# EAGLE board 2. prototipus - THT - Egyoldalas (EAGLE 7.2.0)
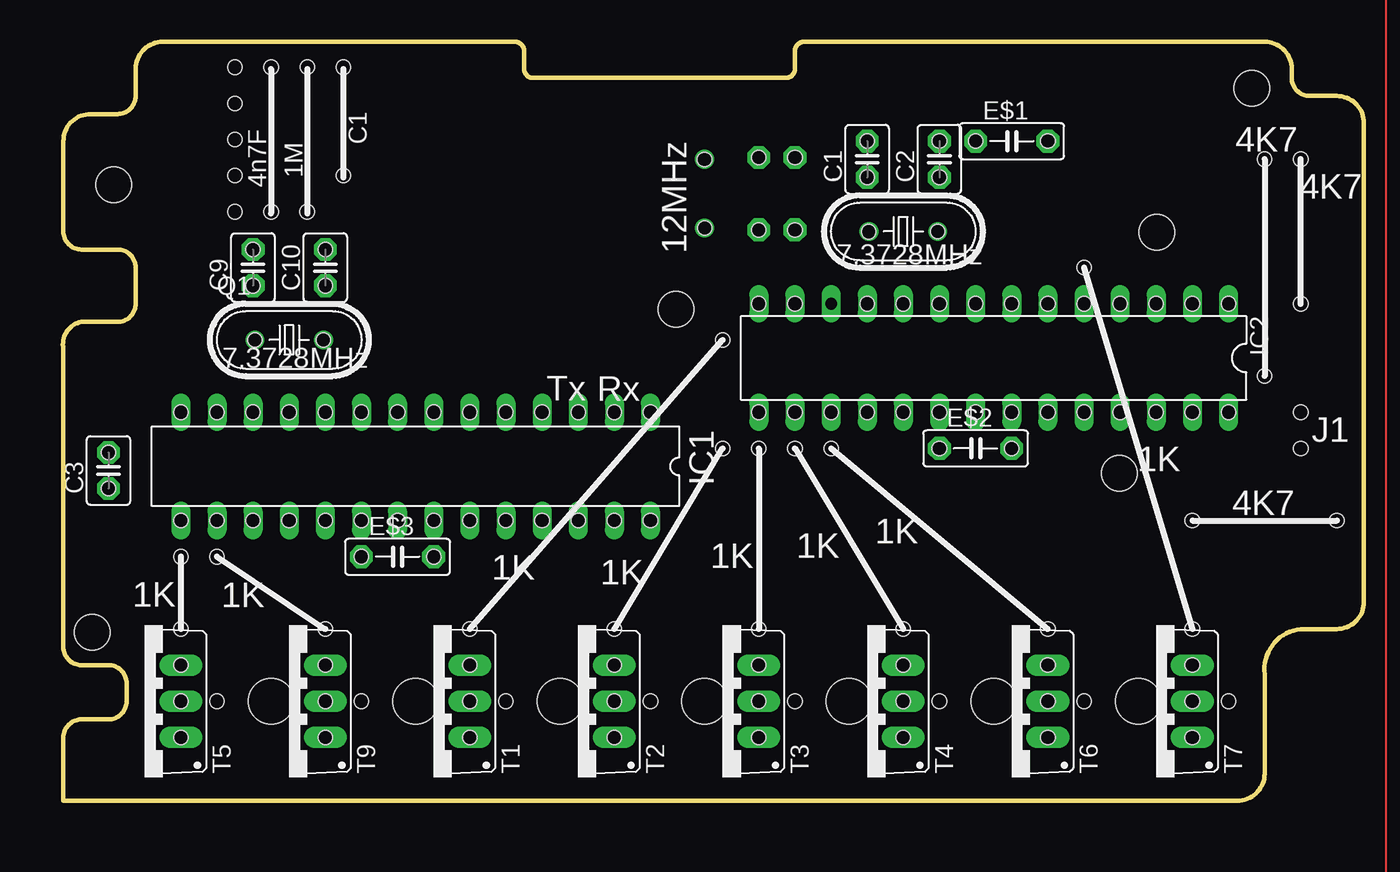
[diagram p0: board, top side]
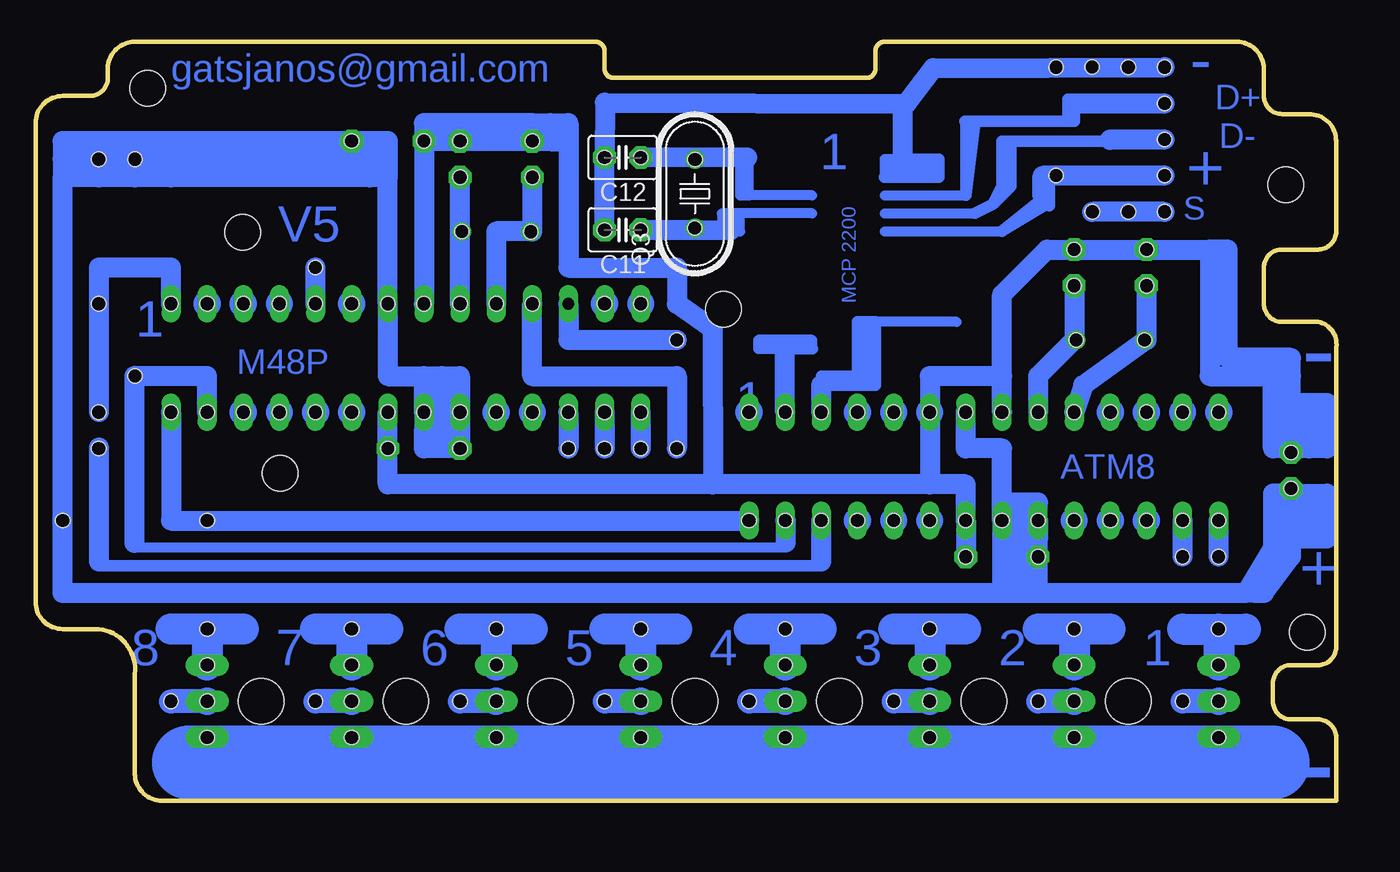
[diagram p1: board, bottom side, seen from below]

Size 91.47 x 53.34 mm. Coordinates in mm from the lower left corner, seen from the top.
Outline: 0.03,0 0.03,4.45 arc-90 1.3,5.71 3.21,5.71 arc90 4.48,6.98 4.48,8.25 arc90 3.21,9.53 1.3,9.53 arc-90 0.03,10.79 0.03,31.75 arc-90 1.3,33.66 3.84,33.66 arc90 5.11,34.92 5.11,37.46 arc90 3.84,38.73 1.3,38.73 arc-90 0.03,40.01 0.03,46.35 arc-90 1.94,48.26 3.84,48.26 arc90 5.11,49.53 5.11,51.44 arc-90 7.02,53.34 31.78,53.34 arc-90 32.42,52.7 32.42,51.44 arc90 33.05,50.8 50.83,50.8 arc90 51.47,51.44 51.47,52.7 arc-90 52.1,53.34 84.49,53.34 arc-90 86.39,51.44 86.39,50.8 arc90 87.66,49.53 89.57,49.53 arc-90 91.47,47.62 91.47,13.97 arc-90 89.57,12.07 87.03,12.07 arc90 84.49,8.89 84.49,1.9 arc-90 82.58,0 0.03,0
Copper layers (1*16): Top 0.035mm / dielectric 1.5mm / Bottom 0.035mm
Design rules "default": minimum track width 10mil, minimum drill 24mil, track to track 8mil, track to pad 8mil, pad to pad 8mil, via to via 8mil, smd to smd 8mil, copper to edge 40mil, drill to drill 8mil, minimum pad ring 10mil, minimum via ring 8mil, stop-mask expansion 4mil, vias tented up to drill 0mil, thermal gap 10mil
Holes 1 mm at 79.41,19.68 84.49,29.84 71.79,37.46 79.41,12.07 69.25,12.07 59.09,12.07 48.93,12.07 38.77,12.07 28.61,12.07 18.45,12.07 8.29,12.07 10.83,17.14 8.29,17.14 48.93,24.77 51.47,24.77 54.01,24.77 46.39,32.38 46.39,24.77 89.57,19.68 19.71,51.55 19.71,43.93 12.09,51.55 12.09,49.01 12.09,46.47 12.09,43.93 12.09,41.39 14.63,41.39 17.17,41.39 14.63,51.55 17.19,51.58 51.46,45.2 51.46,40.12 48.92,40.12 48.92,45.2 45.11,45.07 45.11,40.24 13.37,38.73 13.37,36.2 18.45,36.2 18.45,38.73 18.32,32.38 13.49,32.38 18.45,27.3 20.99,27.3 56.55,43.81 56.55,46.35 61.63,46.35 61.63,43.81 61.5,40.01 56.66,39.99 59.09,34.92 61.63,34.92 64.17,34.92 23.53,27.3 26.07,27.3 33.69,27.3 8.29,27.3 10.83,27.3 13.37,27.3 15.91,27.3 28.61,27.3 31.15,27.3 36.23,27.3 38.77,27.3 41.31,27.3 41.31,19.68 38.77,19.68 36.23,19.68 33.69,19.68 31.15,19.68 28.61,19.68 26.07,19.68 23.53,19.68 20.99,19.68 18.45,19.68 15.91,19.68 13.37,19.68 10.83,19.68 8.29,19.68 48.93,27.3 51.47,27.3 54.01,27.3 56.55,27.3 59.09,27.3 61.63,27.3 64.17,27.3 66.71,27.3 69.25,27.3 71.79,27.3 74.33,27.3 76.87,27.3 79.41,27.3 81.95,27.3 81.95,34.92 79.41,34.92 76.87,34.92 74.33,34.92 71.79,34.92 69.25,34.92 66.71,34.92 56.55,34.92 51.47,34.92 48.93,34.92 8.29,9.53 8.29,6.98 8.29,4.45 18.45,4.45 18.45,6.98 18.45,9.53 28.61,9.53 28.61,6.98 28.61,4.45 38.77,4.45 38.77,6.98 38.77,9.53 48.93,9.53 48.93,6.98 48.93,4.45 59.09,4.45 59.09,6.98 59.09,9.53 69.25,9.53 69.25,6.98 69.25,4.45 79.41,4.45 79.41,6.98 79.41,9.53 64.17,46.35 69.25,46.35 20.99,17.14 26.07,17.14 87.03,34.92 87.03,45.09 84.49,45.09 61.63,24.77 66.71,24.77 3.21,24.48 3.21,21.94 87.03,27.3 87.03,24.77 10.83,6.98 20.99,6.98 31.15,6.98 41.31,6.98 51.47,6.98 61.63,6.98 71.79,6.98 81.95,6.98
Holes 3.2 mm at 14.64,6.98 24.8,6.98 34.96,6.98 45.12,6.98 55.28,6.98 65.44,6.98 75.6,6.98
Holes 2.5 mm at 83.58,50.06 76.91,39.96 74.27,23.01 2.06,11.84 3.57,43.29 43.11,34.55
vRestrict: area 29.2,31.7 to 40,45.1

## Footprints (pad centres in the part's own frame; a part is rotated, then mirrored left to right if it is on the bottom)
HC49U70 = drill 0.813: 1 -2.413,0; 2 2.413,0
C2.5-3 = drill 0.813 pad 1.6 octagon: 1 -1.27,0; 2 1.27,0
C5B2.5 = drill 0.813 pad 1.6 octagon: 1 -2.54,0; 2 2.54,0
DIL28-3 = drill 0.813 long: 1 -16.51,-3.81; 2 -13.97,-3.81; 3 -11.43,-3.81; 4 -8.89,-3.81; 5 -6.35,-3.81; 6 -3.81,-3.81; 7 -1.27,-3.81; 8 1.27,-3.81; 9 3.81,-3.81; 10 6.35,-3.81; 11 8.89,-3.81; 12 11.43,-3.81; 13 13.97,-3.81; 14 16.51,-3.81; 15 16.51,3.81; 16 13.97,3.81; 17 11.43,3.81; 18 8.89,3.81; 19 6.35,3.81; 20 3.81,3.81; 21 1.27,3.81; 22 -1.27,3.81; 23 -3.81,3.81; 24 -6.35,3.81; 25 -8.89,3.81; 26 -11.43,3.81; 27 -13.97,3.81; 28 -16.51,3.81
TO220BV = drill 1.016 long: 1 -2.54,-2.54; 2 0,-2.54; 3 2.54,-2.54

## Placement (x,y rotation side)
-  [HC49U70]  59.09,40.01 0 top
C1  [C2.5-3]  56.55,45.09 90 top
C2  [C2.5-3]  61.63,45.09 90 top
C3  [C2.5-3]  3.21,23.21 90 top
C9  [C2.5-3]  13.37,37.46 90 top
C10  [C2.5-3]  18.45,37.46 90 top
C11  [C2.5-3]  50.19,40.12 180 bottom
C12  [C2.5-3]  50.19,45.2 180 bottom
E$1  [C5B2.5]  66.71,46.35 0 top
E$2  [C5B2.5]  64.17,24.77 0 top
E$3  [C5B2.5]  23.53,17.14 0 top
IC1  MEGA8-P  [DIL28-3]  24.8,23.5 180 top
IC2  [DIL28-3]  65.44,31.12 180 top
Q1  [HC49U70]  15.91,32.38 0 top
Q3  [HC49U70]  45.11,42.66 90 bottom
T1  2SC1306  [TO220BV]  26.07,6.98 90 top
T2  2SC1306  [TO220BV]  36.23,6.98 90 top
T3  2SC1306  [TO220BV]  46.39,6.98 90 top
T4  2SC1306  [TO220BV]  56.55,6.98 90 top
T5  2SC1306  [TO220BV]  5.75,6.98 90 top
T6  2SC1306  [TO220BV]  66.71,6.98 90 top
T7  2SC1306  [TO220BV]  76.87,6.98 90 top
T9  2SC1306  [TO220BV]  15.91,6.98 90 top

## Library data of the parts
- Q1 Q3 = crystal; OC_FARNELL: unknown; OC_NEWARK: unknown
C1-C3 C9-C12 E$1-E$3 = capacitor-wima
IC1 = atmel; OC_FARNELL: unknown; OC_NEWARK: unknown
IC2 = ic-package
T1-T7 T9 = transistor-neu-to92

## Nets
GND: C1.2 C2.2 C9.2 C10.2 IC1.8 IC1.22 IC2.8 IC2.22
N$1: IC1.7 IC1.20 IC1.21 IC2.7 IC2.20 IC2.21
S$2: C2.1 IC2.9
S$3: C1.1 IC2.10
S$5: C10.1 IC1.9
S$6: C9.1
S$8: IC1.15
S$9: IC1.16
S$10: T5.3
S$11: T9.3
S$12: T1.3
S$13: T2.3
S$14: T3.3
S$15: T4.3
S$16: T6.3
S$17: T7.3
S$19: IC2.11
S$20: IC2.12
S$21: IC2.15
S$22: IC2.16
S$23: IC2.17
S$24: IC2.5
S$28: IC1.28 IC2.28
S$29: C11.2 C12.2
S$30: C11.1
S$33: T3.2
S$38: IC1.2
S$42: IC1.3
S$46: IC1.14
S$58: IC2.27
S$60: IC2.1
S$68: C12.1

## Tracks (layer width: path | path; a pad name or v marks a point on that pad's centre or on a via)
GND
  Bottom 1.016: 57.82,46.35 C2.2 64.17,46.35 | 20.35,38.73 C10.2 C9.2
  Bottom 1.422: C1.2 57.82,46.35 | 57.82,46.35 64.17,46.35 | 64.17,46.35 IC2.8 | C1.2 56.55,47.62 | 56.55,47.62 57.82,47.62 | 57.82,47.62 57.82,46.35 | 57.82,47.62 64.17,47.62 64.17,46.35 | 55.28,46.35 C1.2 | 56.55,47.62 55.28,47.62 | 55.28,47.62 55.28,46.35 | IC2.22 66.71,22.23 43.85,22.23 | 28.61,22.23 26.07,22.23 IC1.22 26.07,17.14 | 28.61,22.23 43.85,22.23 | IC1.8 23.53,29.84 | 23.53,29.84 23.53,35.56 20.35,38.73 C9.2 8.92,38.73 | 8.92,38.73 8.92,29.84 4.48,29.84 | 4.48,24.77 4.48,29.84 | 3.21,29.84 4.48,29.84 | 23.53,29.84 28.61,29.84 28.61,22.23 | 3.21,29.84 3.21,31.12 7.65,31.12 7.65,38.73 8.92,38.73 | 3.21,25.4 3.21,29.84 | 55.28,47.62 54.01,47.62 54.01,46.35 | 55.28,46.35 54.01,46.35 | 54.01,46.35 54.01,37.46 46.39,37.46 46.39,34.92 43.86,33.17 43.85,22.23
N$1
  Bottom 1.422: 64.17,29.84 66.71,29.84 IC2.7 66.71,43.81 | 62.9,29.84 61.63,29.84 IC2.20 | IC2.21 62.9,27.3 | 62.9,27.3 IC2.20 | 66.71,43.81 67.98,43.81 | 67.98,43.81 81.95,43.81 | 81.95,43.81 84.49,43.81 | 84.49,43.81 87.03,43.81 | 87.03,43.81 89.57,43.81 | 66.71,43.81 66.71,46.35 67.98,46.35 | IC2.21 64.17,29.84 | 64.17,29.84 62.9,29.84 | 62.9,29.84 62.9,27.3 | 89.57,43.81 89.57,14.61 23.53,14.61 | 67.98,46.35 67.98,43.81 | IC2.20 IC2.21 | IC2.21 64.17,26.04 | 64.17,26.04 61.63,26.04 IC2.20 | 81.95,43.81 81.95,45.09 | 84.49,43.81 84.49,45.09 | 87.03,43.81 87.03,45.09 | 81.95,45.09 87.03,45.09 | 81.95,45.09 68.61,45.09 | 87.03,45.09 89.57,45.09 | 89.57,45.09 89.57,43.81 | IC2.20 61.63,24.77 64.17,24.77 64.17,26.04 | IC1.7 26.07,24.77 23.53,24.77 23.53,20.95 | 23.53,20.95 20.99,20.95 IC1.20 | IC1.21 23.53,20.95 | IC1.21 23.53,18.41 | IC1.20 IC1.21 | IC1.20 20.99,18.41 | 20.99,18.41 22.26,18.41 | 22.26,18.41 23.53,18.41 | 20.99,14.61 20.99,18.41 | 20.99,14.61 6.38,14.61 | 22.26,14.61 20.99,14.61 | 67.98,46.35 89.57,46.35 89.57,45.09 | 6.38,14.61 3.21,17.78 | 3.21,17.78 3.21,21.59 | 3.21,21.59 4.48,21.59 4.48,17.78 6.38,14.61 | 3.21,17.78 3.21,17.14 | 3.21,17.14 5.75,14.61 | 5.75,14.61 6.38,14.61 | 5.75,14.61 5.11,14.61 3.21,17.14 | 23.53,18.41 23.53,14.61 | 23.53,14.61 22.26,14.61 | 22.26,14.61 22.26,18.41 | 1.94,18.41 0.67,18.41 0.67,20.32 0.67,20.95 0.67,21.59 3.21,21.59 | 1.94,18.41 1.94,20.95 | 1.94,18.41 2.57,18.41
S$1
  Bottom 0.7: 38.77,17.78 84.49,17.78
S$2
  Bottom 1.422: IC2.9 C2.1
S$3
  Bottom 1.422: C1.1 56.55,40.01 59.09,40.01 IC2.10
S$4
  Bottom 0.813: 36.23,16.51 87.03,16.51
S$5
  Bottom 1.422: C10.1 18.45,32.38 20.99,29.84 IC1.9
S$6
  Bottom 0.305: 13.37,32.38 14,32.38
  Bottom 1.422: C9.1 13.37,32.38 17.81,29.21 18.45,27.3
S$7
  Bottom 2.184: 10.83,12.07 6.38,12.07
S$8
  Bottom 1.422: 8.29,17.14 IC1.15
S$9
  Bottom 1.422: IC1.16 10.83,17.14
S$10
  Bottom 2.184: 8.29,12.07 T5.3
S$11
  Bottom 2.184: 18.45,12.07 T9.3
S$12
  Bottom 2.184: 28.61,12.07 T1.3
S$13
  Bottom 2.184: 38.77,12.07 T2.3
S$14
  Bottom 2.184: 48.93,12.07 T3.3
S$15
  Bottom 2.184: 59.09,12.07 T4.3
S$16
  Bottom 2.184: 69.25,12.07 T6.3
S$17
  Bottom 2.184: 79.41,12.07 T7.3
S$18
  Bottom 5.2: 80.7,2.7 4.5,2.7
S$19
  Bottom 1.422: 46.39,24.77 46.39,29.84 56.55,29.84 IC2.11
S$20
  Bottom 1.422: IC2.12 54.01,32.38 46.39,32.38
S$21
  Bottom 1.422: IC2.15 48.93,24.77
S$22
  Bottom 1.422: IC2.16 51.47,24.77
S$23
  Bottom 1.422: IC2.17 54.01,24.77
S$24
  Bottom 1.422: IC2.5 71.79,37.46
S$25
  Bottom 2.184: 15.91,12.07 20.99,12.07 | 26.07,12.07 31.15,12.07 | 36.23,12.07 41.31,12.07 | 46.39,12.07 51.47,12.07 | 56.55,12.07 61.63,12.07 | 66.71,12.07 71.79,12.07 | 76.87,12.07 81.95,12.07
S$26
  Bottom 0.813: 18.88,47.98 18.88,49.31 18.15,49.31
S$27
  Bottom 1.422: 1.94,27.94 2.57,27.94 | 1.94,27.94 1.94,24.77 | 1.94,27.94 0.67,27.94 0.67,24.77 4.48,24.77
S$28
  Bottom 1.422: IC2.28 81.95,19.68 IC1.28
S$29
  Bottom 1.422: 12.09,51.55 28.36,51.49 30.23,48.99 51.45,49.05 C12.2 C11.2
S$30
  Bottom 1.422: C11.1 45.11,40.12 42.63,40.09
S$31
  Bottom 0.813: 26.12,47.74 18.44,47.74 18.44,49.01
  Bottom 1.422: 18.44,49.01 12.09,49.01
S$32
  Bottom 0.7: 36.86,42.55 41.31,42.55 | 41.31,42.55 41.31,45.09 41.94,45.09 41.94,42.55 41.31,42.55
  Bottom 0.813: 44.99,45.08 41.31,45.09
S$33
  Bottom 1.676: T3.2 51.47,6.98 | 59.09,6.98 61.63,6.98 | 69.25,6.98 71.79,6.98 | 79.41,6.98 81.95,6.98 | 38.77,6.98 41.31,6.98 | 28.61,6.98 31.15,6.98 | 18.45,6.98 20.99,6.98 | 8.29,6.98 10.83,6.98
S$34
  Bottom 0.7: 31.78,41.27 25.43,41.27
  Bottom 0.813: 23.53,43.32 23.53,46.35 22.89,46.35 | 22.89,46.35 22.89,43.18 24.16,41.91 | 22.89,46.35 15.91,46.35 | 25.43,41.27 24.16,41.91 | 24.16,41.91 23.53,43.18
S$35
  Bottom 1.422: 12.09,43.93 20.67,43.91
S$36
  Bottom 1.422: 12.09,46.47 15.92,46.47 15.92,46.45
S$37
  Bottom 1.422: 12.09,41.39 17.17,41.39
S$38
  Bottom 0.7: 36.86,32.38 40.67,32.38 40.67,31.75 38.77,31.75 36.86,31.75 36.86,32.38
  Bottom 0.813: 38.13,31.75 38.77,31.75
  Bottom 1.422: IC1.2 38.77,31.75
S$42
  Bottom 0.7: 26.7,33.66 32.42,33.66
  Bottom 0.813: 33.05,29.21 36.23,29.21 36.23,29.84 33.69,29.84 | 33.05,29.21 33.05,29.84 | 33.05,29.84 33.05,33.02 | 33.05,29.84 33.69,29.84 | 33.05,29.21 32.42,29.21 32.42,33.66 33.69,33.66 33.69,29.84
  Bottom 1.422: IC1.3 36.23,29.21
S$43
  Bottom 0.813: 36.86,31.75 38.77,31.75
S$44
  Bottom 0.7: 30.51,44.45 31.78,44.45 | 31.78,44.45 31.78,43.81 | 30.51,45.09 31.78,45.09 31.78,44.45
  Bottom 0.813: 31.78,43.81 27.97,43.81 27.97,45.09 29.88,45.09 29.88,44.45 28.61,44.45
  Bottom 1.422: 30.51,48.9 30.51,45.09 30.51,44.45
S$45
  Bottom 0.813: 25.84,47.74 25.86,47.74
S$50
  Bottom 0.7: 31.78,42.55 26.07,42.55
  Bottom 0.813: 26.07,42.55 25.43,47.62 26.07,47.62 26.07,42.55
S$56
  Bottom 1.422: 38.77,19.68 38.74,19.68 38.74,18.13
S$57
  Bottom 1.422: 36.23,19.69 36.24,19.69 36.24,16.8
S$58
  Bottom 1.422: 84.49,29.84 79.41,29.84 IC2.27
S$59
  Bottom 1.422: 84.49,29.85 84.52,29.85 84.52,18.11
S$60
  Bottom 1.422: IC2.1 81.95,37.46 87.03,37.46 87.03,27.3
S$61
  Bottom 1.422: 87.02,24.81 87.02,16.81
S$68
  Bottom 1.422: 41.43,45.21 C12.1
S$72
  Bottom 0.813: 20.2,41.83 20.2,43.99 19.56,43.99
S$73
  Bottom 0.7: 36.86,41.27 41.94,41.27 | 41.94,41.27 42.58,41.27 | 42.58,41.27 42.58,40.01 41.94,40.01 41.94,41.27 | 42.58,41.27 43.21,41.27 43.21,40.64
S$74
  Bottom 0.7: 31.78,40.01 23.53,40.01
  Bottom 0.813: 20.35,41.91 23.53,40.01 20.35,42.55
S$75
  Bottom 0.813: 20.99,43.81 20.99,42.55
(copper drawn outside any net)
  shapes: Bottom circle x34, Top area x1

## Text on the board
Bottom: - | gatsjanos@gmail.com | D+ | D- | 1 | + | S | V5 | MCP 2200 | 1 | - | M48P | 1 | ATM8 | + | 1 | 2 | 3 | 4 | 5 | 6 | 7 | 8 | -
tPlace: 4n7F | C1 | 4K7 | 1M | 4K7 | 12MHz | 7.3728MHz | 7.3728MHz | Tx | Rx | J1 | 1K | 4K7 | 1K | 1K | 1K | 1K | 1K | 1K | 1K